# Altium PCB Light Panel.PcbDoc (part 1 of 2)
Units mm, origin at the board's own origin, x right, y up, seen from the top; angles counter-clockwise.
Board outline 300 x 185 mm, 2 copper layers (Top Layer, Bottom Layer), stack 1.671 mm thick; 278 components, 216 nets, 569 pads, 0 vias.
Unrouted connection lines stored in the file: 11.
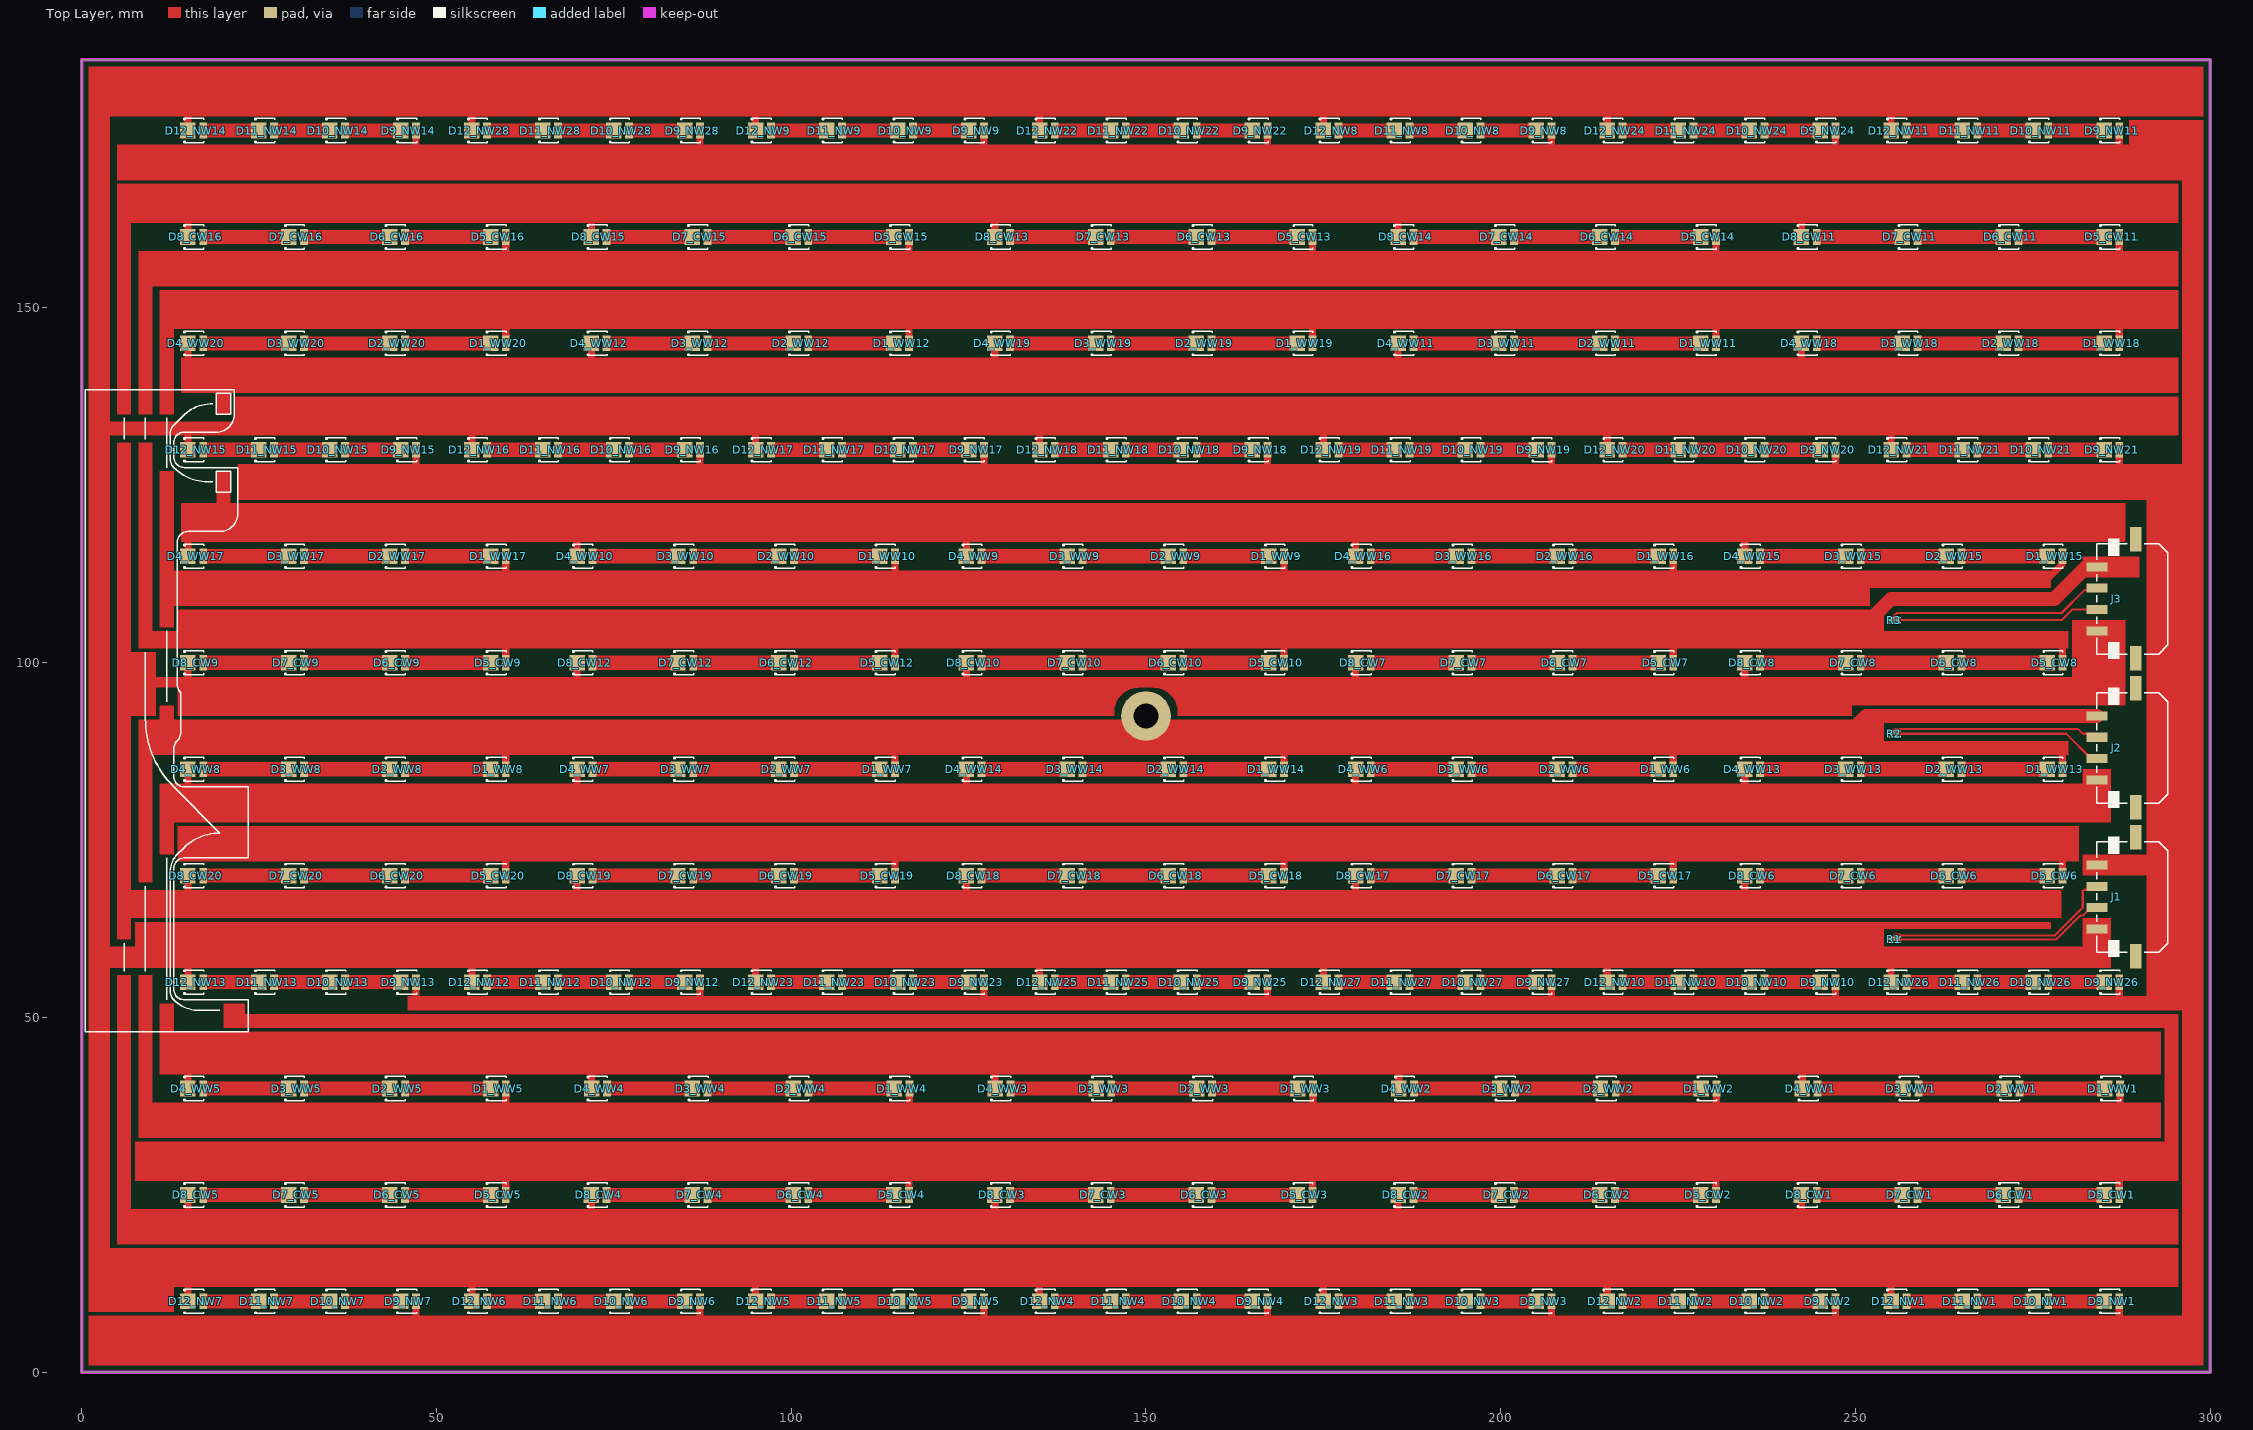
[diagram p0: Top Layer view]
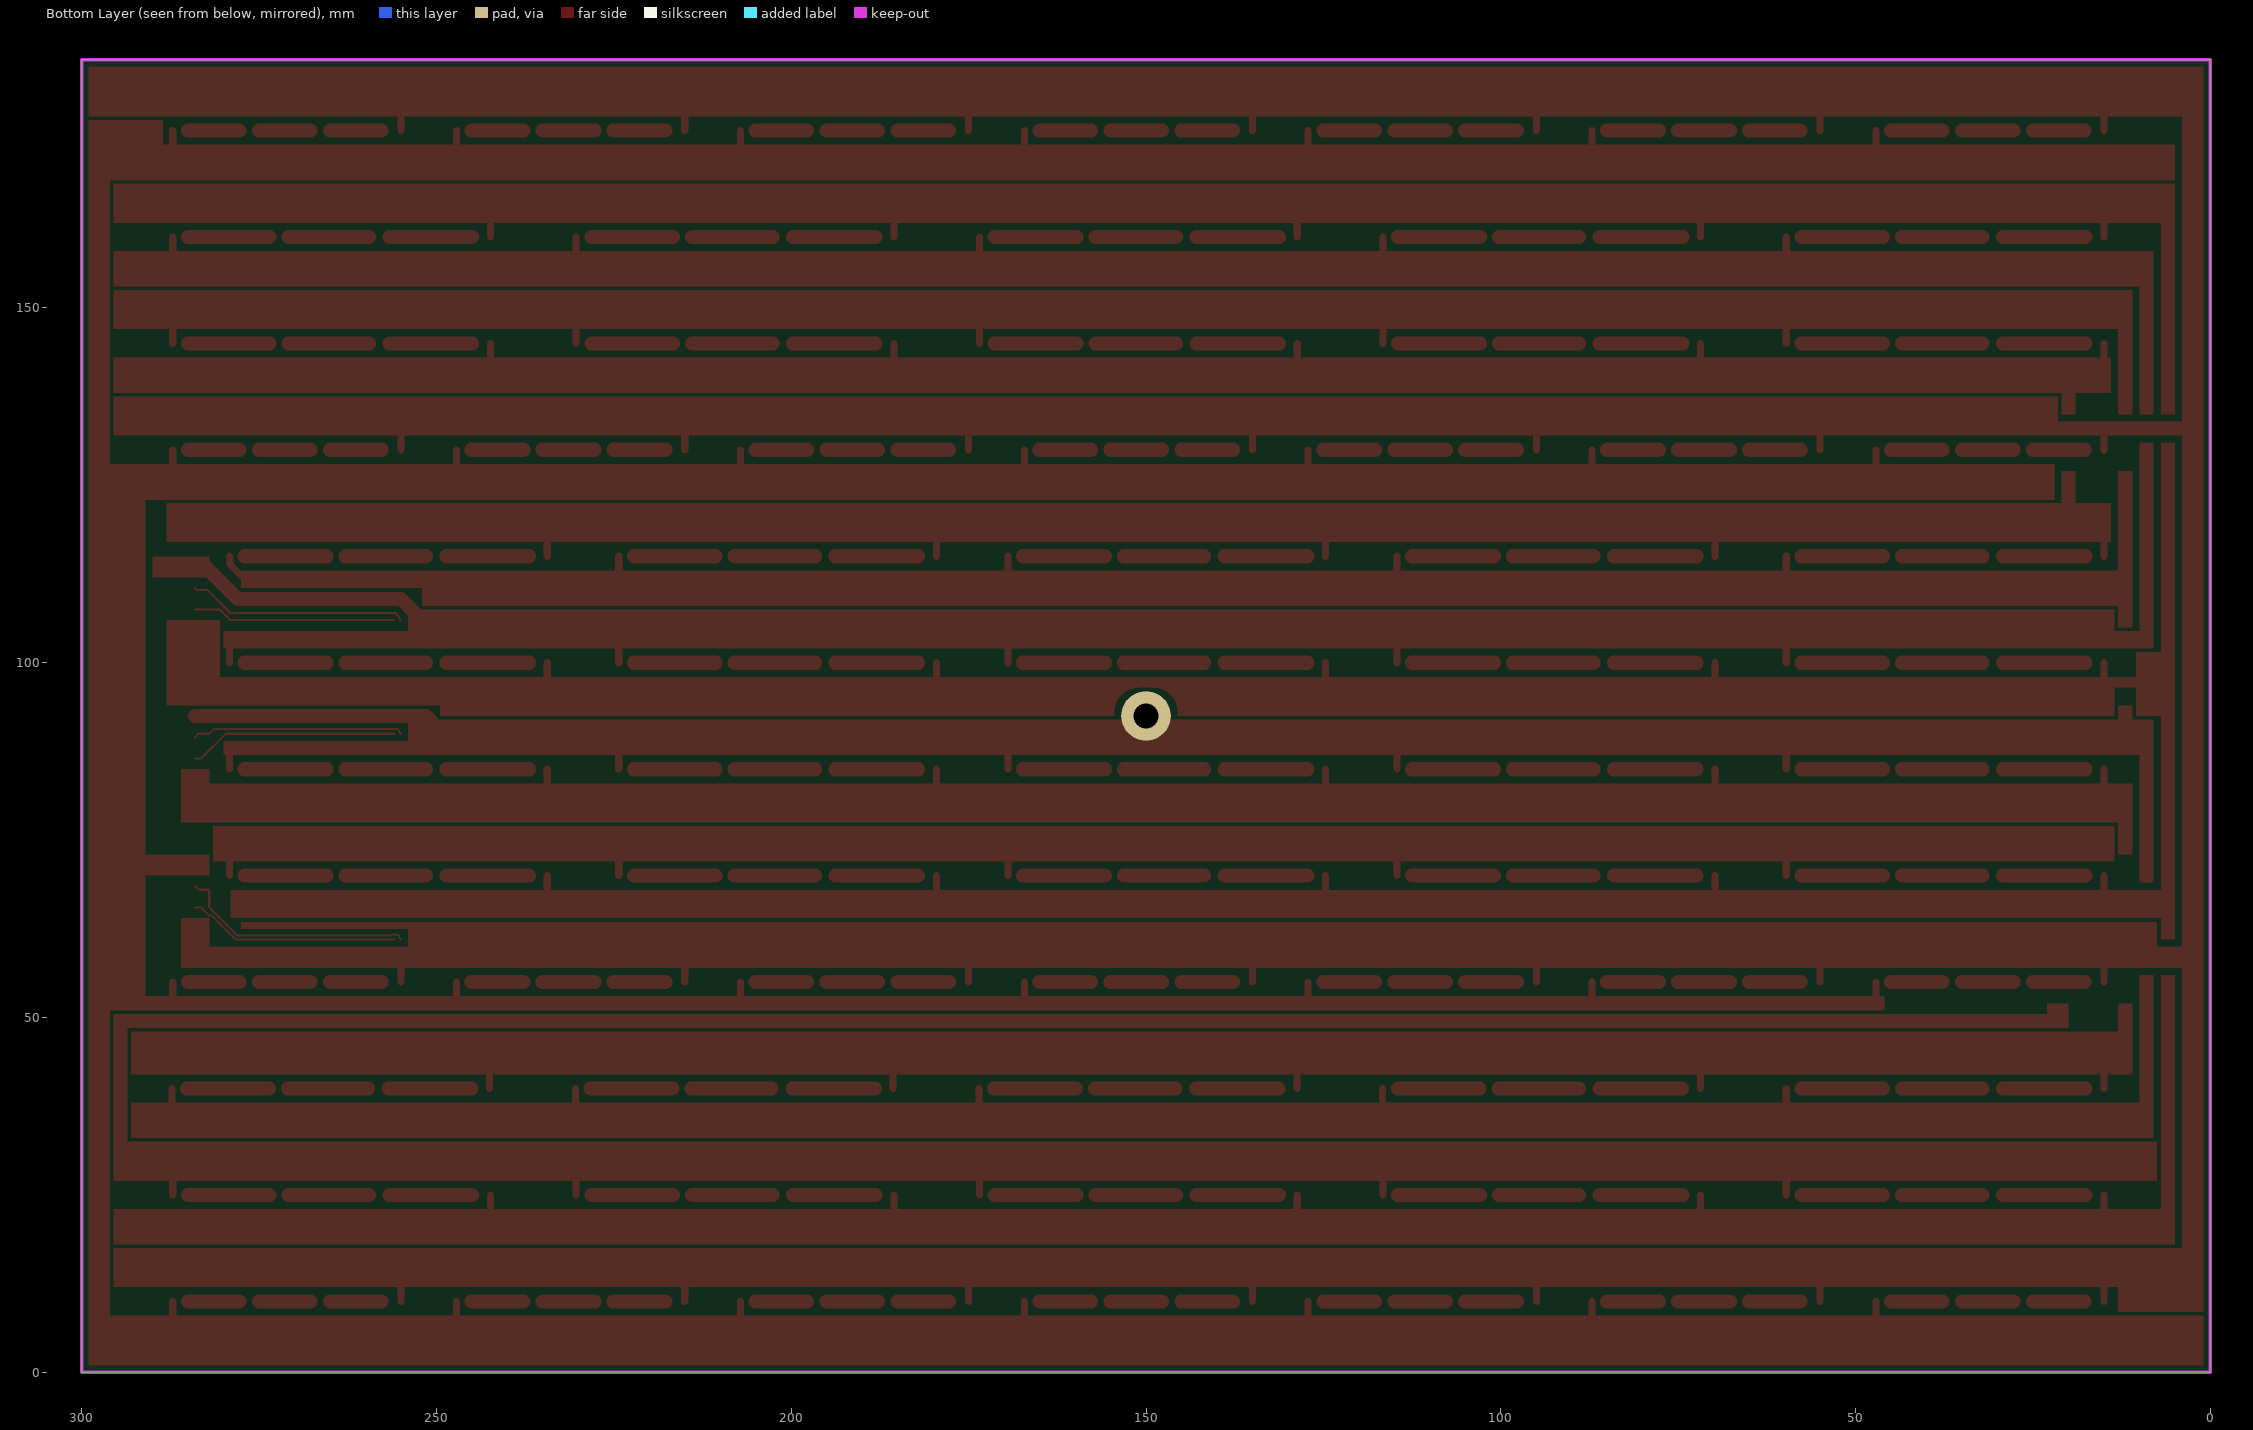
[diagram p1: Bottom Layer view, seen from below]
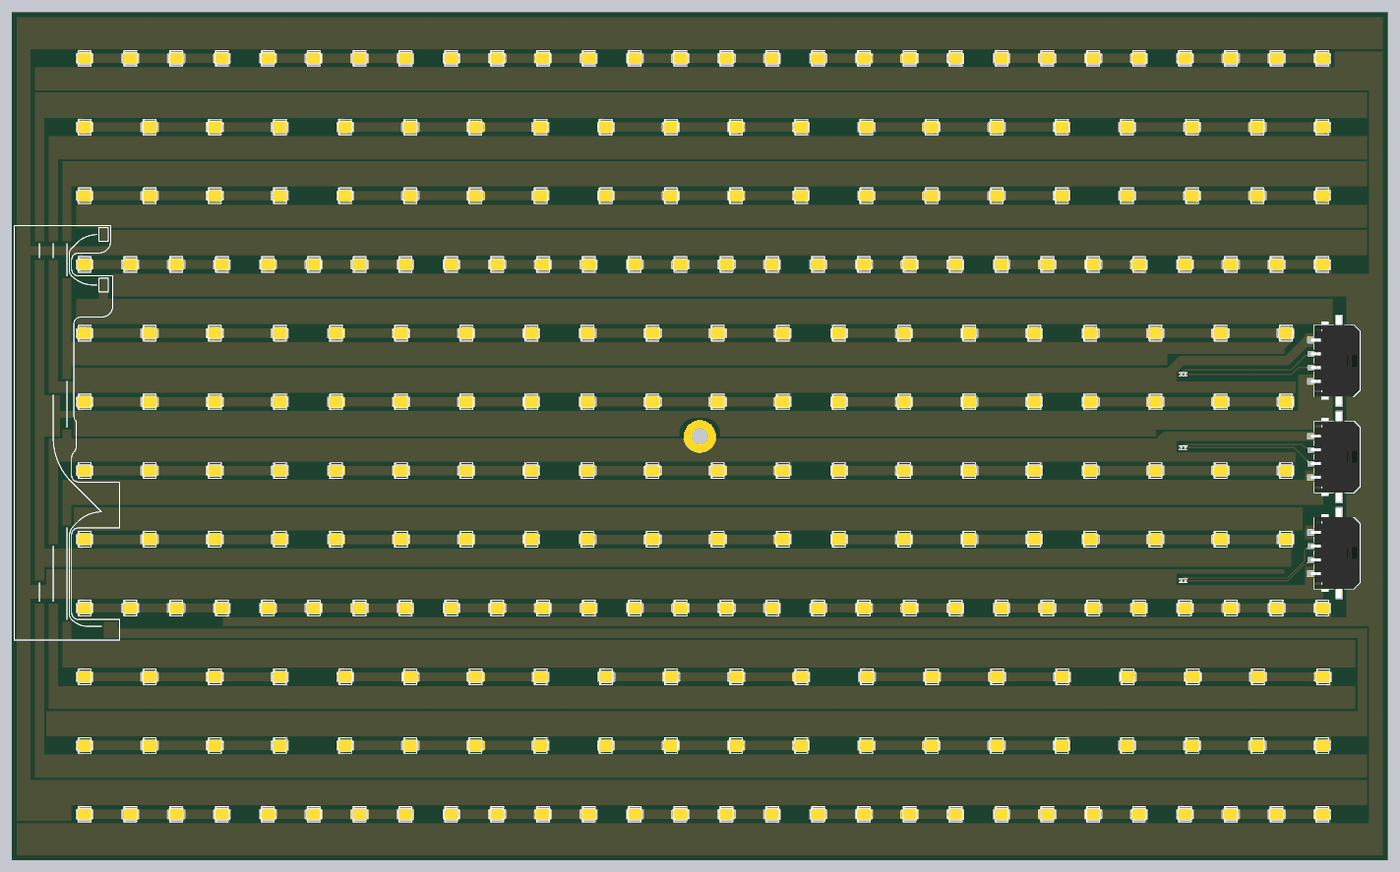
[diagram p3: 3D render of the assembled board from above, using the file's embedded part models]

## Layer stack, top to bottom
Top Solder: solder mask 0.0102, Solder Resist, Dk 3.5
Top Layer: signal copper 0.0356
Dielectric 1: dielectric 0.2, FR-4, Dk 4.8
Aluminium: core 1.4, Al, Dk 4.5
Bottom Layer: signal copper 0.0356
Bottom Solder: solder mask 0.0102, Solder Resist, Dk 3.5

## Board outline
0,0 300,0 300,185 0,185

## Design rules (kind name [scope] priority, off if disabled: settings)
Clearance [All] p1: gap=0.254 ignorepadtopadclearanceinfootprint=FALSE except(0: Arc-Hole Track-Hole SMDPad-Hole THPad-Hole Via-Hole Fill-Hole Poly-Hole Region-Hole Text-Hole)
PolygonConnect [All] p1: connectstyle=Direct reliefconductorwidth=0.254 reliefentries=4 polygonreliefangle="90 Angle" airgapwidth=0.254
RoomDefinition "Studio Light Panel" [InComponentClass('Studio Light Panel')] p1: confinementstyle=ConfineIn formatcopy=TRUE lockcomponents=FALSE outline 300,46.75 300,131.75 250,131.75 250,46.75
RoomDefinition WW15 [InComponentClass('WW15')] p2: confinementstyle=ConfineIn formatcopy=TRUE lockcomponents=FALSE outline 281.818,117.5 231.868,117.5 231.868,112.5 281.818,112.5
RoomDefinition WW13 [InComponentClass('WW13')] p3: confinementstyle=ConfineIn formatcopy=TRUE lockcomponents=FALSE outline 281.818,87.5 231.868,87.5 231.868,82.5 281.818,82.5
RoomDefinition CW8 [InComponentClass('CW8')] p4: confinementstyle=ConfineIn formatcopy=TRUE lockcomponents=FALSE outline 282,102.5 232,102.5 232,97.5 282,97.5
RoomDefinition CW6 [InComponentClass('CW6')] p5: confinementstyle=ConfineIn formatcopy=TRUE lockcomponents=FALSE outline 282,72.5 232,72.5 232,67.5 282,67.5
RoomDefinition WW1 [InComponentClass('WW1')] p6: confinementstyle=ConfineIn formatcopy=TRUE lockcomponents=FALSE outline 289.95,42.5 240,42.5 240,37.5 289.95,37.5
RoomDefinition CW7 [InComponentClass('CW7')] p7: confinementstyle=ConfineIn formatcopy=TRUE lockcomponents=FALSE outline 227.158,102.5 177.158,102.5 177.158,97.5 227.158,97.5
RoomDefinition NW1 [InComponentClass('NW1')] p8: confinementstyle=ConfineIn formatcopy=TRUE lockcomponents=FALSE outline 290,12.5 252,12.5 252,7.5 290,7.5
RoomDefinition NW2 [InComponentClass('NW2')] p9: confinementstyle=ConfineIn formatcopy=TRUE lockcomponents=FALSE outline 250,12.5 212,12.5 212,7.5 250,7.5
RoomDefinition NW3 [InComponentClass('NW3')] p10: confinementstyle=ConfineIn formatcopy=TRUE lockcomponents=FALSE outline 210,12.5 172,12.5 172,7.5 210,7.5
RoomDefinition NW4 [InComponentClass('NW4')] p11: confinementstyle=ConfineIn formatcopy=TRUE lockcomponents=FALSE outline 170,12.5 132,12.5 132,7.5 170,7.5
RoomDefinition NW5 [InComponentClass('NW5')] p12: confinementstyle=ConfineIn formatcopy=TRUE lockcomponents=FALSE outline 130,12.5 92,12.5 92,7.5 130,7.5
RoomDefinition NW6 [InComponentClass('NW6')] p13: confinementstyle=ConfineIn formatcopy=TRUE lockcomponents=FALSE outline 90,12.5 52,12.5 52,7.5 90,7.5
RoomDefinition NW7 [InComponentClass('NW7')] p14: confinementstyle=ConfineIn formatcopy=TRUE lockcomponents=FALSE outline 50,12.5 12,12.5 12,7.5 50,7.5
RoomDefinition NW8 [InComponentClass('NW8')] p15: confinementstyle=ConfineIn formatcopy=TRUE lockcomponents=FALSE outline 210,177.5 172,177.5 172,172.5 210,172.5
RoomDefinition NW9 [InComponentClass('NW9')] p16: confinementstyle=ConfineIn formatcopy=TRUE lockcomponents=FALSE outline 130,177.5 92,177.5 92,172.5 130,172.5
RoomDefinition NW10 [InComponentClass('NW10')] p17: confinementstyle=ConfineIn formatcopy=TRUE lockcomponents=FALSE outline 250,57.5 212,57.5 212,52.5 250,52.5
RoomDefinition NW12 [InComponentClass('NW12')] p18: confinementstyle=ConfineIn formatcopy=TRUE lockcomponents=FALSE outline 90,57.5 52,57.5 52,52.5 90,52.5
RoomDefinition NW13 [InComponentClass('NW13')] p19: confinementstyle=ConfineIn formatcopy=TRUE lockcomponents=FALSE outline 50,57.5 12,57.5 12,52.5 50,52.5
RoomDefinition NW14 [InComponentClass('NW14')] p20: confinementstyle=ConfineIn formatcopy=TRUE lockcomponents=FALSE outline 50,177.5 12,177.5 12,172.5 50,172.5
RoomDefinition NW15 [InComponentClass('NW15')] p21: confinementstyle=ConfineIn formatcopy=TRUE lockcomponents=FALSE outline 50,132.5 12,132.5 12,127.5 50,127.5
RoomDefinition NW16 [InComponentClass('NW16')] p22: confinementstyle=ConfineIn formatcopy=TRUE lockcomponents=FALSE outline 90,132.5 52,132.5 52,127.5 90,127.5
RoomDefinition NW17 [InComponentClass('NW17')] p23: confinementstyle=ConfineIn formatcopy=TRUE lockcomponents=FALSE outline 130,132.5 92,132.5 92,127.5 130,127.5
RoomDefinition NW18 [InComponentClass('NW18')] p24: confinementstyle=ConfineIn formatcopy=TRUE lockcomponents=FALSE outline 170,132.5 132,132.5 132,127.5 170,127.5
RoomDefinition NW19 [InComponentClass('NW19')] p25: confinementstyle=ConfineIn formatcopy=TRUE lockcomponents=FALSE outline 210,132.5 172,132.5 172,127.5 210,127.5
RoomDefinition NW20 [InComponentClass('NW20')] p26: confinementstyle=ConfineIn formatcopy=TRUE lockcomponents=FALSE outline 250,132.5 212,132.5 212,127.5 250,127.5
RoomDefinition NW21 [InComponentClass('NW21')] p27: confinementstyle=ConfineIn formatcopy=TRUE lockcomponents=FALSE outline 290,132.5 252,132.5 252,127.5 290,127.5
RoomDefinition NW22 [InComponentClass('NW22')] p28: confinementstyle=ConfineIn formatcopy=TRUE lockcomponents=FALSE outline 170,177.5 132,177.5 132,172.5 170,172.5
RoomDefinition NW23 [InComponentClass('NW23')] p29: confinementstyle=ConfineIn formatcopy=TRUE lockcomponents=FALSE outline 130,57.5 92,57.5 92,52.5 130,52.5
RoomDefinition NW24 [InComponentClass('NW24')] p30: confinementstyle=ConfineIn formatcopy=TRUE lockcomponents=FALSE outline 250,177.5 212,177.5 212,172.5 250,172.5
RoomDefinition NW25 [InComponentClass('NW25')] p31: confinementstyle=ConfineIn formatcopy=TRUE lockcomponents=FALSE outline 170,57.5 132,57.5 132,52.5 170,52.5
RoomDefinition NW26 [InComponentClass('NW26')] p32: confinementstyle=ConfineIn formatcopy=TRUE lockcomponents=FALSE outline 290,57.5 252,57.5 252,52.5 290,52.5
RoomDefinition NW27 [InComponentClass('NW27')] p33: confinementstyle=ConfineIn formatcopy=TRUE lockcomponents=FALSE outline 210,57.5 172,57.5 172,52.5 210,52.5
RoomDefinition NW28 [InComponentClass('NW28')] p34: confinementstyle=ConfineIn formatcopy=TRUE lockcomponents=FALSE outline 90,177.5 52,177.5 52,172.5 90,172.5
RoomDefinition CW1 [InComponentClass('CW1')] p35: confinementstyle=ConfineIn formatcopy=TRUE lockcomponents=FALSE outline 290,27.5 240,27.5 240,22.5 290,22.5
RoomDefinition CW19 [InComponentClass('CW19')] p36: confinementstyle=ConfineIn formatcopy=TRUE lockcomponents=FALSE outline 117.474,72.5 67.474,72.5 67.474,67.5 117.474,67.5
RoomDefinition CW18 [InComponentClass('CW18')] p37: confinementstyle=ConfineIn formatcopy=TRUE lockcomponents=FALSE outline 172.316,72.5 122.316,72.5 122.316,67.5 172.316,67.5
RoomDefinition CW17 [InComponentClass('CW17')] p38: confinementstyle=ConfineIn formatcopy=TRUE lockcomponents=FALSE outline 227.158,72.5 177.158,72.5 177.158,67.5 227.158,67.5
RoomDefinition CW16 [InComponentClass('CW16')] p39: confinementstyle=ConfineIn formatcopy=TRUE lockcomponents=FALSE outline 62.632,162.5 12.632,162.5 12.632,157.5 62.632,157.5
RoomDefinition CW15 [InComponentClass('CW15')] p40: confinementstyle=ConfineIn formatcopy=TRUE lockcomponents=FALSE outline 119.474,162.5 69.474,162.5 69.474,157.5 119.474,157.5
RoomDefinition CW14 [InComponentClass('CW14')] p41: confinementstyle=ConfineIn formatcopy=TRUE lockcomponents=FALSE outline 233.158,162.5 183.158,162.5 183.158,157.5 233.158,157.5
RoomDefinition CW13 [InComponentClass('CW13')] p42: confinementstyle=ConfineIn formatcopy=TRUE lockcomponents=FALSE outline 176.316,162.5 126.316,162.5 126.316,157.5 176.316,157.5
RoomDefinition CW12 [InComponentClass('CW12')] p43: confinementstyle=ConfineIn formatcopy=TRUE lockcomponents=FALSE outline 117.474,102.5 67.474,102.5 67.474,97.5 117.474,97.5
RoomDefinition CW11 [InComponentClass('CW11')] p44: confinementstyle=ConfineIn formatcopy=TRUE lockcomponents=FALSE outline 290,162.5 240,162.5 240,157.5 290,157.5
RoomDefinition CW2 [InComponentClass('CW2')] p45: confinementstyle=ConfineIn formatcopy=TRUE lockcomponents=FALSE outline 233.158,27.5 183.158,27.5 183.158,22.5 233.158,22.5
RoomDefinition CW3 [InComponentClass('CW3')] p46: confinementstyle=ConfineIn formatcopy=TRUE lockcomponents=FALSE outline 176.316,27.5 126.316,27.5 126.316,22.5 176.316,22.5
RoomDefinition CW4 [InComponentClass('CW4')] p47: confinementstyle=ConfineIn formatcopy=TRUE lockcomponents=FALSE outline 119.474,27.5 69.474,27.5 69.474,22.5 119.474,22.5
RoomDefinition CW5 [InComponentClass('CW5')] p48: confinementstyle=ConfineIn formatcopy=TRUE lockcomponents=FALSE outline 62.632,27.5 12.632,27.5 12.632,22.5 62.632,22.5
RoomDefinition CW9 [InComponentClass('CW9')] p49: confinementstyle=ConfineIn formatcopy=TRUE lockcomponents=FALSE outline 62.632,102.5 12.632,102.5 12.632,97.5 62.632,97.5
RoomDefinition CW20 [InComponentClass('CW20')] p50: confinementstyle=ConfineIn formatcopy=TRUE lockcomponents=FALSE outline 62.632,72.5 12.632,72.5 12.632,67.5 62.632,67.5
RoomDefinition CW10 [InComponentClass('CW10')] p51: confinementstyle=ConfineIn formatcopy=TRUE lockcomponents=FALSE outline 172.316,102.5 122.316,102.5 122.316,97.5 172.316,97.5
RoomDefinition WW20 [InComponentClass('WW20')] p52: confinementstyle=ConfineIn formatcopy=TRUE lockcomponents=FALSE outline 62.45,147.5 12.5,147.5 12.5,142.5 62.45,142.5
RoomDefinition WW19 [InComponentClass('WW19')] p53: confinementstyle=ConfineIn formatcopy=TRUE lockcomponents=FALSE outline 176.134,147.5 126.184,147.5 126.184,142.5 176.134,142.5
RoomDefinition WW18 [InComponentClass('WW18')] p54: confinementstyle=ConfineIn formatcopy=TRUE lockcomponents=FALSE outline 289.818,147.5 239.868,147.5 239.868,142.5 289.818,142.5
RoomDefinition WW17 [InComponentClass('WW17')] p55: confinementstyle=ConfineIn formatcopy=TRUE lockcomponents=FALSE outline 62.45,117.5 12.5,117.5 12.5,112.5 62.45,112.5
RoomDefinition WW16 [InComponentClass('WW16')] p56: confinementstyle=ConfineIn formatcopy=TRUE lockcomponents=FALSE outline 226.976,117.5 177.026,117.5 177.026,112.5 226.976,112.5
RoomDefinition WW14 [InComponentClass('WW14')] p57: confinementstyle=ConfineIn formatcopy=TRUE lockcomponents=FALSE outline 172.134,87.5 122.184,87.5 122.184,82.5 172.134,82.5
RoomDefinition WW12 [InComponentClass('WW12')] p58: confinementstyle=ConfineIn formatcopy=TRUE lockcomponents=FALSE outline 119.292,147.5 69.342,147.5 69.342,142.5 119.292,142.5
RoomDefinition WW11 [InComponentClass('WW11')] p59: confinementstyle=ConfineIn formatcopy=TRUE lockcomponents=FALSE outline 232.976,147.5 183.026,147.5 183.026,142.5 232.976,142.5
RoomDefinition WW10 [InComponentClass('WW10')] p60: confinementstyle=ConfineIn formatcopy=TRUE lockcomponents=FALSE outline 117.292,117.5 67.342,117.5 67.342,112.5 117.292,112.5
RoomDefinition WW9 [InComponentClass('WW9')] p61: confinementstyle=ConfineIn formatcopy=TRUE lockcomponents=FALSE outline 172.134,117.5 122.184,117.5 122.184,112.5 172.134,112.5
RoomDefinition WW8 [InComponentClass('WW8')] p62: confinementstyle=ConfineIn formatcopy=TRUE lockcomponents=FALSE outline 62.45,87.5 12.5,87.5 12.5,82.5 62.45,82.5
RoomDefinition WW7 [InComponentClass('WW7')] p63: confinementstyle=ConfineIn formatcopy=TRUE lockcomponents=FALSE outline 117.292,87.5 67.342,87.5 67.342,82.5 117.292,82.5
RoomDefinition WW6 [InComponentClass('WW6')] p64: confinementstyle=ConfineIn formatcopy=TRUE lockcomponents=FALSE outline 226.976,87.5 177.026,87.5 177.026,82.5 226.976,82.5
RoomDefinition WW5 [InComponentClass('WW5')] p65: confinementstyle=ConfineIn formatcopy=TRUE lockcomponents=FALSE outline 62.45,42.5 12.5,42.5 12.5,37.5 62.45,37.5
RoomDefinition WW4 [InComponentClass('WW4')] p66: confinementstyle=ConfineIn formatcopy=TRUE lockcomponents=FALSE outline 119.325,42.5 69.375,42.5 69.375,37.5 119.325,37.5
RoomDefinition WW3 [InComponentClass('WW3')] p67: confinementstyle=ConfineIn formatcopy=TRUE lockcomponents=FALSE outline 176.2,42.5 126.25,42.5 126.25,37.5 176.2,37.5
RoomDefinition WW2 [InComponentClass('WW2')] p68: confinementstyle=ConfineIn formatcopy=TRUE lockcomponents=FALSE outline 233.075,42.5 183.125,42.5 183.125,37.5 233.075,37.5
RoomDefinition NW11 [InComponentClass('NW11')] p69: confinementstyle=ConfineIn formatcopy=TRUE lockcomponents=FALSE outline 290,177.5 252,177.5 252,172.5 290,172.5
RoutingVias [All] p1: holewidth=0.711 width=1.27 viastyle="Through Hole" minholewidth=0.711 minwidth=1.27 maxholewidth=0.711 maxwidth=1.27
SolderMaskExpansion [All] p1: expansion=0.102 istentingtop=FALSE
Width [All] p1: maxlimit=6 minlimit=0.3 preferedwidth=2.5
30 further rules are at their usual default settings.

## Classes and differential pairs
channel class "Warm White LEDs": WW1 WW2 WW3 WW4 WW5 WW6 WW7 WW8 WW9 WW10 WW11 WW12 WW13 WW14 WW15 WW16 WW17 WW18 WW19 WW20
channel class "Neutral White LEDs": NW1 NW2 NW3 NW4 NW5 NW6 NW7 NW8 NW9 NW10 NW11 NW12 NW13 NW14 NW15 NW16 NW17 NW18 NW19 NW20 NW21 NW22 NW23 NW24 NW25 NW26 NW27 NW28
channel class "Cool White LEDs": CW1 CW2 CW3 CW4 CW5 CW6 CW7 CW8 CW9 CW10 CW11 CW12 CW13 CW14 CW15 CW16 CW17 CW18 CW19 CW20
component class WW20: D1_WW20 D2_WW20 D3_WW20 D4_WW20
component class WW19: D1_WW19 D2_WW19 D3_WW19 D4_WW19
component class WW18: D1_WW18 D2_WW18 D3_WW18 D4_WW18
component class WW17: D1_WW17 D2_WW17 D3_WW17 D4_WW17
component class WW16: D1_WW16 D2_WW16 D3_WW16 D4_WW16
component class WW15: D1_WW15 D2_WW15 D3_WW15 D4_WW15
component class WW14: D1_WW14 D2_WW14 D3_WW14 D4_WW14
component class WW13: D1_WW13 D2_WW13 D3_WW13 D4_WW13
component class WW12: D1_WW12 D2_WW12 D3_WW12 D4_WW12
component class WW11: D1_WW11 D2_WW11 D3_WW11 D4_WW11
component class WW10: D1_WW10 D2_WW10 D3_WW10 D4_WW10
component class WW9: D1_WW9 D2_WW9 D3_WW9 D4_WW9
component class WW8: D1_WW8 D2_WW8 D3_WW8 D4_WW8
component class WW7: D1_WW7 D2_WW7 D3_WW7 D4_WW7
component class WW6: D1_WW6 D2_WW6 D3_WW6 D4_WW6
component class WW5: D1_WW5 D2_WW5 D3_WW5 D4_WW5
component class WW4: D1_WW4 D2_WW4 D3_WW4 D4_WW4
component class WW3: D1_WW3 D2_WW3 D3_WW3 D4_WW3
component class WW2: D1_WW2 D2_WW2 D3_WW2 D4_WW2
component class WW1: D1_WW1 D2_WW1 D3_WW1 D4_WW1
component class "Studio Light Panel": J1 J2 J3 R1 R2 R3
component class NW28: D9_NW28 D10_NW28 D11_NW28 D12_NW28
component class NW27: D9_NW27 D10_NW27 D11_NW27 D12_NW27
component class NW26: D9_NW26 D10_NW26 D11_NW26 D12_NW26
component class NW25: D9_NW25 D10_NW25 D11_NW25 D12_NW25
component class NW24: D9_NW24 D10_NW24 D11_NW24 D12_NW24
component class NW23: D9_NW23 D10_NW23 D11_NW23 D12_NW23
component class NW22: D9_NW22 D10_NW22 D11_NW22 D12_NW22
component class NW21: D9_NW21 D10_NW21 D11_NW21 D12_NW21
component class NW20: D9_NW20 D10_NW20 D11_NW20 D12_NW20
component class NW19: D9_NW19 D10_NW19 D11_NW19 D12_NW19
component class NW18: D9_NW18 D10_NW18 D11_NW18 D12_NW18
component class NW17: D9_NW17 D10_NW17 D11_NW17 D12_NW17
component class NW16: D9_NW16 D10_NW16 D11_NW16 D12_NW16
component class NW15: D9_NW15 D10_NW15 D11_NW15 D12_NW15
component class NW14: D9_NW14 D10_NW14 D11_NW14 D12_NW14
component class NW13: D9_NW13 D10_NW13 D11_NW13 D12_NW13
component class NW12: D9_NW12 D10_NW12 D11_NW12 D12_NW12
component class NW11: D9_NW11 D10_NW11 D11_NW11 D12_NW11
component class NW10: D9_NW10 D10_NW10 D11_NW10 D12_NW10
component class NW9: D9_NW9 D10_NW9 D11_NW9 D12_NW9
component class NW8: D9_NW8 D10_NW8 D11_NW8 D12_NW8
component class NW7: D9_NW7 D10_NW7 D11_NW7 D12_NW7
component class NW6: D9_NW6 D10_NW6 D11_NW6 D12_NW6
component class NW5: D9_NW5 D10_NW5 D11_NW5 D12_NW5
component class NW4: D9_NW4 D10_NW4 D11_NW4 D12_NW4
component class NW3: D9_NW3 D10_NW3 D11_NW3 D12_NW3
component class NW2: D9_NW2 D10_NW2 D11_NW2 D12_NW2
component class NW1: D9_NW1 D10_NW1 D11_NW1 D12_NW1
component class CW20: D5_CW20 D6_CW20 D7_CW20 D8_CW20
component class CW19: D5_CW19 D6_CW19 D7_CW19 D8_CW19
component class CW18: D5_CW18 D6_CW18 D7_CW18 D8_CW18
component class CW17: D5_CW17 D6_CW17 D7_CW17 D8_CW17
component class CW16: D5_CW16 D6_CW16 D7_CW16 D8_CW16
component class CW15: D5_CW15 D6_CW15 D7_CW15 D8_CW15
component class CW14: D5_CW14 D6_CW14 D7_CW14 D8_CW14
component class CW13: D5_CW13 D6_CW13 D7_CW13 D8_CW13
component class CW12: D5_CW12 D6_CW12 D7_CW12 D8_CW12
component class CW11: D5_CW11 D6_CW11 D7_CW11 D8_CW11
component class CW10: D5_CW10 D6_CW10 D7_CW10 D8_CW10
component class CW9: D5_CW9 D6_CW9 D7_CW9 D8_CW9
component class CW8: D5_CW8 D6_CW8 D7_CW8 D8_CW8
component class CW7: D5_CW7 D6_CW7 D7_CW7 D8_CW7
component class CW6: D5_CW6 D6_CW6 D7_CW6 D8_CW6
component class CW5: D5_CW5 D6_CW5 D7_CW5 D8_CW5
component class CW4: D5_CW4 D6_CW4 D7_CW4 D8_CW4
component class CW3: D5_CW3 D6_CW3 D7_CW3 D8_CW3
component class CW2: D5_CW2 D6_CW2 D7_CW2 D8_CW2
component class CW1: D5_CW1 D6_CW1 D7_CW1 D8_CW1

## Components (designator, comment, footprint, x,y, rotation, side; value= is the part's Value field where it differs from the comment)
D1_WW1 "SPMWH1228MD7WAVUVK" "SAMSUNG LM281BPLUS" 285.937,40 r180 top (schematic designator D1)
D1_WW2 "SPMWH1228MD7WAVUVK" "SAMSUNG LM281BPLUS" 229.062,40 r180 top (schematic designator D1)
D1_WW3 "SPMWH1228MD7WAVUVK" "SAMSUNG LM281BPLUS" 172.187,40 r180 top (schematic designator D1)
D1_WW4 "SPMWH1228MD7WAVUVK" "SAMSUNG LM281BPLUS" 115.312,40 r180 top (schematic designator D1)
D1_WW5 "SPMWH1228MD7WAVUVK" "SAMSUNG LM281BPLUS" 58.437,40 r180 top (schematic designator D1)
D1_WW6 "SPMWH1228MD7WAVUVK" "SAMSUNG LM281BPLUS" 222.963,85 r180 top (schematic designator D1)
D1_WW7 "SPMWH1228MD7WAVUVK" "SAMSUNG LM281BPLUS" 113.279,85 r180 top (schematic designator D1)
D1_WW8 "SPMWH1228MD7WAVUVK" "SAMSUNG LM281BPLUS" 58.437,85 r180 top (schematic designator D1)
D1_WW9 "SPMWH1228MD7WAVUVK" "SAMSUNG LM281BPLUS" 168.121,115 r180 top (schematic designator D1)
D1_WW10 "SPMWH1228MD7WAVUVK" "SAMSUNG LM281BPLUS" 113.279,115 r180 top (schematic designator D1)
D1_WW11 "SPMWH1228MD7WAVUVK" "SAMSUNG LM281BPLUS" 228.963,145 r180 top (schematic designator D1)
D1_WW12 "SPMWH1228MD7WAVUVK" "SAMSUNG LM281BPLUS" 115.279,145 r180 top (schematic designator D1)
D1_WW13 "SPMWH1228MD7WAVUVK" "SAMSUNG LM281BPLUS" 277.805,85 r180 top (schematic designator D1)
D1_WW14 "SPMWH1228MD7WAVUVK" "SAMSUNG LM281BPLUS" 168.121,85 r180 top (schematic designator D1)
D1_WW15 "SPMWH1228MD7WAVUVK" "SAMSUNG LM281BPLUS" 277.805,115 r180 top (schematic designator D1)
D1_WW16 "SPMWH1228MD7WAVUVK" "SAMSUNG LM281BPLUS" 222.963,115 r180 top (schematic designator D1)
D1_WW17 "SPMWH1228MD7WAVUVK" "SAMSUNG LM281BPLUS" 58.437,115 r180 top (schematic designator D1)
D1_WW18 "SPMWH1228MD7WAVUVK" "SAMSUNG LM281BPLUS" 285.805,145 r180 top (schematic designator D1)
D1_WW19 "SPMWH1228MD7WAVUVK" "SAMSUNG LM281BPLUS" 172.121,145 r180 top (schematic designator D1)
D1_WW20 "SPMWH1228MD7WAVUVK" "SAMSUNG LM281BPLUS" 58.437,145 r180 top (schematic designator D1)
D2_WW1 "SPMWH1228MD7WAVUVK" "SAMSUNG LM281BPLUS" 271.726,40 r180 top (schematic designator D2)
D2_WW2 "SPMWH1228MD7WAVUVK" "SAMSUNG LM281BPLUS" 214.851,40 r180 top (schematic designator D2)
D2_WW3 "SPMWH1228MD7WAVUVK" "SAMSUNG LM281BPLUS" 157.976,40 r180 top (schematic designator D2)
D2_WW4 "SPMWH1228MD7WAVUVK" "SAMSUNG LM281BPLUS" 101.101,40 r180 top (schematic designator D2)
D2_WW5 "SPMWH1228MD7WAVUVK" "SAMSUNG LM281BPLUS" 44.226,40 r180 top (schematic designator D2)
D2_WW6 "SPMWH1228MD7WAVUVK" "SAMSUNG LM281BPLUS" 208.752,85 r180 top (schematic designator D2)
D2_WW7 "SPMWH1228MD7WAVUVK" "SAMSUNG LM281BPLUS" 99.068,85 r180 top (schematic designator D2)
D2_WW8 "SPMWH1228MD7WAVUVK" "SAMSUNG LM281BPLUS" 44.226,85 r180 top (schematic designator D2)
D2_WW9 "SPMWH1228MD7WAVUVK" "SAMSUNG LM281BPLUS" 153.91,115 r180 top (schematic designator D2)
D2_WW10 "SPMWH1228MD7WAVUVK" "SAMSUNG LM281BPLUS" 99.068,115 r180 top (schematic designator D2)
D2_WW11 "SPMWH1228MD7WAVUVK" "SAMSUNG LM281BPLUS" 214.752,145 r180 top (schematic designator D2)
D2_WW12 "SPMWH1228MD7WAVUVK" "SAMSUNG LM281BPLUS" 101.068,145 r180 top (schematic designator D2)
D2_WW13 "SPMWH1228MD7WAVUVK" "SAMSUNG LM281BPLUS" 263.594,85 r180 top (schematic designator D2)
D2_WW14 "SPMWH1228MD7WAVUVK" "SAMSUNG LM281BPLUS" 153.91,85 r180 top (schematic designator D2)
D2_WW15 "SPMWH1228MD7WAVUVK" "SAMSUNG LM281BPLUS" 263.594,115 r180 top (schematic designator D2)
D2_WW16 "SPMWH1228MD7WAVUVK" "SAMSUNG LM281BPLUS" 208.752,115 r180 top (schematic designator D2)
D2_WW17 "SPMWH1228MD7WAVUVK" "SAMSUNG LM281BPLUS" 44.226,115 r180 top (schematic designator D2)
D2_WW18 "SPMWH1228MD7WAVUVK" "SAMSUNG LM281BPLUS" 271.594,145 r180 top (schematic designator D2)
D2_WW19 "SPMWH1228MD7WAVUVK" "SAMSUNG LM281BPLUS" 157.91,145 r180 top (schematic designator D2)
D2_WW20 "SPMWH1228MD7WAVUVK" "SAMSUNG LM281BPLUS" 44.226,145 r180 top (schematic designator D2)
D3_WW1 "SPMWH1228MD7WAVUVK" "SAMSUNG LM281BPLUS" 257.516,40 r180 top (schematic designator D3)
D3_WW2 "SPMWH1228MD7WAVUVK" "SAMSUNG LM281BPLUS" 200.641,40 r180 top (schematic designator D3)
D3_WW3 "SPMWH1228MD7WAVUVK" "SAMSUNG LM281BPLUS" 143.766,40 r180 top (schematic designator D3)
D3_WW4 "SPMWH1228MD7WAVUVK" "SAMSUNG LM281BPLUS" 86.891,40 r180 top (schematic designator D3)
D3_WW5 "SPMWH1228MD7WAVUVK" "SAMSUNG LM281BPLUS" 30.016,40 r180 top (schematic designator D3)
D3_WW6 "SPMWH1228MD7WAVUVK" "SAMSUNG LM281BPLUS" 194.542,85 r180 top (schematic designator D3)
D3_WW7 "SPMWH1228MD7WAVUVK" "SAMSUNG LM281BPLUS" 84.858,85 r180 top (schematic designator D3)
D3_WW8 "SPMWH1228MD7WAVUVK" "SAMSUNG LM281BPLUS" 30.016,85 r180 top (schematic designator D3)
D3_WW9 "SPMWH1228MD7WAVUVK" "SAMSUNG LM281BPLUS" 139.7,115 r180 top (schematic designator D3)
D3_WW10 "SPMWH1228MD7WAVUVK" "SAMSUNG LM281BPLUS" 84.858,115 r180 top (schematic designator D3)
D3_WW11 "SPMWH1228MD7WAVUVK" "SAMSUNG LM281BPLUS" 200.542,145 r180 top (schematic designator D3)
D3_WW12 "SPMWH1228MD7WAVUVK" "SAMSUNG LM281BPLUS" 86.858,145 r180 top (schematic designator D3)
D3_WW13 "SPMWH1228MD7WAVUVK" "SAMSUNG LM281BPLUS" 249.384,85 r180 top (schematic designator D3)
D3_WW14 "SPMWH1228MD7WAVUVK" "SAMSUNG LM281BPLUS" 139.7,85 r180 top (schematic designator D3)
D3_WW15 "SPMWH1228MD7WAVUVK" "SAMSUNG LM281BPLUS" 249.384,115 r180 top (schematic designator D3)
D3_WW16 "SPMWH1228MD7WAVUVK" "SAMSUNG LM281BPLUS" 194.542,115 r180 top (schematic designator D3)
D3_WW17 "SPMWH1228MD7WAVUVK" "SAMSUNG LM281BPLUS" 30.016,115 r180 top (schematic designator D3)
D3_WW18 "SPMWH1228MD7WAVUVK" "SAMSUNG LM281BPLUS" 257.384,145 r180 top (schematic designator D3)
D3_WW19 "SPMWH1228MD7WAVUVK" "SAMSUNG LM281BPLUS" 143.7,145 r180 top (schematic designator D3)
D3_WW20 "SPMWH1228MD7WAVUVK" "SAMSUNG LM281BPLUS" 30.016,145 r180 top (schematic designator D3)
D4_WW1 "SPMWH1228MD7WAVUVK" "SAMSUNG LM281BPLUS" 243.305,40 r180 top (schematic designator D4)
D4_WW2 "SPMWH1228MD7WAVUVK" "SAMSUNG LM281BPLUS" 186.43,40 r180 top (schematic designator D4)
D4_WW3 "SPMWH1228MD7WAVUVK" "SAMSUNG LM281BPLUS" 129.555,40 r180 top (schematic designator D4)
D4_WW4 "SPMWH1228MD7WAVUVK" "SAMSUNG LM281BPLUS" 72.68,40 r180 top (schematic designator D4)
D4_WW5 "SPMWH1228MD7WAVUVK" "SAMSUNG LM281BPLUS" 15.805,40 r180 top (schematic designator D4)
D4_WW6 "SPMWH1228MD7WAVUVK" "SAMSUNG LM281BPLUS" 180.331,85 r180 top (schematic designator D4)
D4_WW7 "SPMWH1228MD7WAVUVK" "SAMSUNG LM281BPLUS" 70.647,85 r180 top (schematic designator D4)
D4_WW8 "SPMWH1228MD7WAVUVK" "SAMSUNG LM281BPLUS" 15.805,85 r180 top (schematic designator D4)
D4_WW9 "SPMWH1228MD7WAVUVK" "SAMSUNG LM281BPLUS" 125.489,115 r180 top (schematic designator D4)
D4_WW10 "SPMWH1228MD7WAVUVK" "SAMSUNG LM281BPLUS" 70.647,115 r180 top (schematic designator D4)
D4_WW11 "SPMWH1228MD7WAVUVK" "SAMSUNG LM281BPLUS" 186.331,145 r180 top (schematic designator D4)
D4_WW12 "SPMWH1228MD7WAVUVK" "SAMSUNG LM281BPLUS" 72.647,145 r180 top (schematic designator D4)
D4_WW13 "SPMWH1228MD7WAVUVK" "SAMSUNG LM281BPLUS" 235.173,85 r180 top (schematic designator D4)
D4_WW14 "SPMWH1228MD7WAVUVK" "SAMSUNG LM281BPLUS" 125.489,85 r180 top (schematic designator D4)
D4_WW15 "SPMWH1228MD7WAVUVK" "SAMSUNG LM281BPLUS" 235.173,115 r180 top (schematic designator D4)
D4_WW16 "SPMWH1228MD7WAVUVK" "SAMSUNG LM281BPLUS" 180.331,115 r180 top (schematic designator D4)
D4_WW17 "SPMWH1228MD7WAVUVK" "SAMSUNG LM281BPLUS" 15.805,115 r180 top (schematic designator D4)
D4_WW18 "SPMWH1228MD7WAVUVK" "SAMSUNG LM281BPLUS" 243.173,145 r180 top (schematic designator D4)
D4_WW19 "SPMWH1228MD7WAVUVK" "SAMSUNG LM281BPLUS" 129.489,145 r180 top (schematic designator D4)
D4_WW20 "SPMWH1228MD7WAVUVK" "SAMSUNG LM281BPLUS" 15.805,145 r180 top (schematic designator D4)
D5_CW1 "SPMWH1228MD7WAPMVL" "SAMSUNG LM281BPLUS" 285.805,25 r180 top (schematic designator D5)
D5_CW2 "SPMWH1228MD7WAPMVL" "SAMSUNG LM281BPLUS" 228.963,25 r180 top (schematic designator D5)
D5_CW3 "SPMWH1228MD7WAPMVL" "SAMSUNG LM281BPLUS" 172.121,25 r180 top (schematic designator D5)
D5_CW4 "SPMWH1228MD7WAPMVL" "SAMSUNG LM281BPLUS" 115.279,25 r180 top (schematic designator D5)
D5_CW5 "SPMWH1228MD7WAPMVL" "SAMSUNG LM281BPLUS" 58.437,25 r180 top (schematic designator D5)
D5_CW6 "SPMWH1228MD7WAPMVL" "SAMSUNG LM281BPLUS" 277.805,70 r180 top (schematic designator D5)
D5_CW7 "SPMWH1228MD7WAPMVL" "SAMSUNG LM281BPLUS" 222.963,100 r180 top (schematic designator D5)
D5_CW8 "SPMWH1228MD7WAPMVL" "SAMSUNG LM281BPLUS" 277.805,100 r180 top (schematic designator D5)
D5_CW9 "SPMWH1228MD7WAPMVL" "SAMSUNG LM281BPLUS" 58.437,100 r180 top (schematic designator D5)
D5_CW10 "SPMWH1228MD7WAPMVL" "SAMSUNG LM281BPLUS" 168.121,100 r180 top (schematic designator D5)
D5_CW11 "SPMWH1228MD7WAPMVL" "SAMSUNG LM281BPLUS" 285.805,160 r180 top (schematic designator D5)
D5_CW12 "SPMWH1228MD7WAPMVL" "SAMSUNG LM281BPLUS" 113.279,100 r180 top (schematic designator D5)
D5_CW13 "SPMWH1228MD7WAPMVL" "SAMSUNG LM281BPLUS" 172.121,160 r180 top (schematic designator D5)
D5_CW14 "SPMWH1228MD7WAPMVL" "SAMSUNG LM281BPLUS" 228.963,160 r180 top (schematic designator D5)
D5_CW15 "SPMWH1228MD7WAPMVL" "SAMSUNG LM281BPLUS" 115.279,160 r180 top (schematic designator D5)
D5_CW16 "SPMWH1228MD7WAPMVL" "SAMSUNG LM281BPLUS" 58.437,160 r180 top (schematic designator D5)
D5_CW17 "SPMWH1228MD7WAPMVL" "SAMSUNG LM281BPLUS" 222.963,70 r180 top (schematic designator D5)
D5_CW18 "SPMWH1228MD7WAPMVL" "SAMSUNG LM281BPLUS" 168.121,70 r180 top (schematic designator D5)
D5_CW19 "SPMWH1228MD7WAPMVL" "SAMSUNG LM281BPLUS" 113.279,70 r180 top (schematic designator D5)
D5_CW20 "SPMWH1228MD7WAPMVL" "SAMSUNG LM281BPLUS" 58.437,70 r180 top (schematic designator D5)
D6_CW1 "SPMWH1228MD7WAPMVL" "SAMSUNG LM281BPLUS" 271.594,25 r180 top (schematic designator D6)
D6_CW2 "SPMWH1228MD7WAPMVL" "SAMSUNG LM281BPLUS" 214.752,25 r180 top (schematic designator D6)
D6_CW3 "SPMWH1228MD7WAPMVL" "SAMSUNG LM281BPLUS" 157.91,25 r180 top (schematic designator D6)
D6_CW4 "SPMWH1228MD7WAPMVL" "SAMSUNG LM281BPLUS" 101.068,25 r180 top (schematic designator D6)
D6_CW5 "SPMWH1228MD7WAPMVL" "SAMSUNG LM281BPLUS" 44.226,25 r180 top (schematic designator D6)
D6_CW6 "SPMWH1228MD7WAPMVL" "SAMSUNG LM281BPLUS" 263.594,70 r180 top (schematic designator D6)
D6_CW7 "SPMWH1228MD7WAPMVL" "SAMSUNG LM281BPLUS" 208.752,100 r180 top (schematic designator D6)
D6_CW8 "SPMWH1228MD7WAPMVL" "SAMSUNG LM281BPLUS" 263.594,100 r180 top (schematic designator D6)
D6_CW9 "SPMWH1228MD7WAPMVL" "SAMSUNG LM281BPLUS" 44.226,100 r180 top (schematic designator D6)
D6_CW10 "SPMWH1228MD7WAPMVL" "SAMSUNG LM281BPLUS" 153.91,100 r180 top (schematic designator D6)
D6_CW11 "SPMWH1228MD7WAPMVL" "SAMSUNG LM281BPLUS" 271.594,160 r180 top (schematic designator D6)
D6_CW12 "SPMWH1228MD7WAPMVL" "SAMSUNG LM281BPLUS" 99.068,100 r180 top (schematic designator D6)
D6_CW13 "SPMWH1228MD7WAPMVL" "SAMSUNG LM281BPLUS" 157.91,160 r180 top (schematic designator D6)
D6_CW14 "SPMWH1228MD7WAPMVL" "SAMSUNG LM281BPLUS" 214.752,160 r180 top (schematic designator D6)
D6_CW15 "SPMWH1228MD7WAPMVL" "SAMSUNG LM281BPLUS" 101.068,160 r180 top (schematic designator D6)
D6_CW16 "SPMWH1228MD7WAPMVL" "SAMSUNG LM281BPLUS" 44.226,160 r180 top (schematic designator D6)
D6_CW17 "SPMWH1228MD7WAPMVL" "SAMSUNG LM281BPLUS" 208.752,70 r180 top (schematic designator D6)
D6_CW18 "SPMWH1228MD7WAPMVL" "SAMSUNG LM281BPLUS" 153.91,70 r180 top (schematic designator D6)
D6_CW19 "SPMWH1228MD7WAPMVL" "SAMSUNG LM281BPLUS" 99.068,70 r180 top (schematic designator D6)
D6_CW20 "SPMWH1228MD7WAPMVL" "SAMSUNG LM281BPLUS" 44.226,70 r180 top (schematic designator D6)
D7_CW1 "SPMWH1228MD7WAPMVL" "SAMSUNG LM281BPLUS" 257.384,25 r180 top (schematic designator D7)
D7_CW2 "SPMWH1228MD7WAPMVL" "SAMSUNG LM281BPLUS" 200.542,25 r180 top (schematic designator D7)
D7_CW3 "SPMWH1228MD7WAPMVL" "SAMSUNG LM281BPLUS" 143.7,25 r180 top (schematic designator D7)
D7_CW4 "SPMWH1228MD7WAPMVL" "SAMSUNG LM281BPLUS" 86.858,25 r180 top (schematic designator D7)
D7_CW5 "SPMWH1228MD7WAPMVL" "SAMSUNG LM281BPLUS" 30.016,25 r180 top (schematic designator D7)
D7_CW6 "SPMWH1228MD7WAPMVL" "SAMSUNG LM281BPLUS" 249.384,70 r180 top (schematic designator D7)
D7_CW7 "SPMWH1228MD7WAPMVL" "SAMSUNG LM281BPLUS" 194.542,100 r180 top (schematic designator D7)
D7_CW8 "SPMWH1228MD7WAPMVL" "SAMSUNG LM281BPLUS" 249.384,100 r180 top (schematic designator D7)
D7_CW9 "SPMWH1228MD7WAPMVL" "SAMSUNG LM281BPLUS" 30.016,100 r180 top (schematic designator D7)
D7_CW10 "SPMWH1228MD7WAPMVL" "SAMSUNG LM281BPLUS" 139.7,100 r180 top (schematic designator D7)
D7_CW11 "SPMWH1228MD7WAPMVL" "SAMSUNG LM281BPLUS" 257.384,160 r180 top (schematic designator D7)
D7_CW12 "SPMWH1228MD7WAPMVL" "SAMSUNG LM281BPLUS" 84.858,100 r180 top (schematic designator D7)
D7_CW13 "SPMWH1228MD7WAPMVL" "SAMSUNG LM281BPLUS" 143.7,160 r180 top (schematic designator D7)
D7_CW14 "SPMWH1228MD7WAPMVL" "SAMSUNG LM281BPLUS" 200.542,160 r180 top (schematic designator D7)
D7_CW15 "SPMWH1228MD7WAPMVL" "SAMSUNG LM281BPLUS" 86.858,160 r180 top (schematic designator D7)
D7_CW16 "SPMWH1228MD7WAPMVL" "SAMSUNG LM281BPLUS" 30.016,160 r180 top (schematic designator D7)
D7_CW17 "SPMWH1228MD7WAPMVL" "SAMSUNG LM281BPLUS" 194.542,70 r180 top (schematic designator D7)
D7_CW18 "SPMWH1228MD7WAPMVL" "SAMSUNG LM281BPLUS" 139.7,70 r180 top (schematic designator D7)
D7_CW19 "SPMWH1228MD7WAPMVL" "SAMSUNG LM281BPLUS" 84.858,70 r180 top (schematic designator D7)
D7_CW20 "SPMWH1228MD7WAPMVL" "SAMSUNG LM281BPLUS" 30.016,70 r180 top (schematic designator D7)
D8_CW1 "SPMWH1228MD7WAPMVL" "SAMSUNG LM281BPLUS" 243.173,25 r180 top (schematic designator D8)
D8_CW2 "SPMWH1228MD7WAPMVL" "SAMSUNG LM281BPLUS" 186.331,25 r180 top (schematic designator D8)
D8_CW3 "SPMWH1228MD7WAPMVL" "SAMSUNG LM281BPLUS" 129.489,25 r180 top (schematic designator D8)
D8_CW4 "SPMWH1228MD7WAPMVL" "SAMSUNG LM281BPLUS" 72.647,25 r180 top (schematic designator D8)
D8_CW5 "SPMWH1228MD7WAPMVL" "SAMSUNG LM281BPLUS" 15.805,25 r180 top (schematic designator D8)
D8_CW6 "SPMWH1228MD7WAPMVL" "SAMSUNG LM281BPLUS" 235.173,70 r180 top (schematic designator D8)
D8_CW7 "SPMWH1228MD7WAPMVL" "SAMSUNG LM281BPLUS" 180.331,100 r180 top (schematic designator D8)
D8_CW8 "SPMWH1228MD7WAPMVL" "SAMSUNG LM281BPLUS" 235.173,100 r180 top (schematic designator D8)
D8_CW9 "SPMWH1228MD7WAPMVL" "SAMSUNG LM281BPLUS" 15.805,100 r180 top (schematic designator D8)
D8_CW10 "SPMWH1228MD7WAPMVL" "SAMSUNG LM281BPLUS" 125.489,100 r180 top (schematic designator D8)
D8_CW11 "SPMWH1228MD7WAPMVL" "SAMSUNG LM281BPLUS" 243.173,160 r180 top (schematic designator D8)
D8_CW12 "SPMWH1228MD7WAPMVL" "SAMSUNG LM281BPLUS" 70.647,100 r180 top (schematic designator D8)
D8_CW13 "SPMWH1228MD7WAPMVL" "SAMSUNG LM281BPLUS" 129.489,160 r180 top (schematic designator D8)
D8_CW14 "SPMWH1228MD7WAPMVL" "SAMSUNG LM281BPLUS" 186.331,160 r180 top (schematic designator D8)
D8_CW15 "SPMWH1228MD7WAPMVL" "SAMSUNG LM281BPLUS" 72.647,160 r180 top (schematic designator D8)
D8_CW16 "SPMWH1228MD7WAPMVL" "SAMSUNG LM281BPLUS" 15.805,160 r180 top (schematic designator D8)
D8_CW17 "SPMWH1228MD7WAPMVL" "SAMSUNG LM281BPLUS" 180.331,70 r180 top (schematic designator D8)
D8_CW18 "SPMWH1228MD7WAPMVL" "SAMSUNG LM281BPLUS" 125.489,70 r180 top (schematic designator D8)
D8_CW19 "SPMWH1228MD7WAPMVL" "SAMSUNG LM281BPLUS" 70.647,70 r180 top (schematic designator D8)
D8_CW20 "SPMWH1228MD7WAPMVL" "SAMSUNG LM281BPLUS" 15.805,70 r180 top (schematic designator D8)
D9_NW1 "SPMWH1228MD7WATMVL" "SAMSUNG LM281BPLUS" 285.805,10 r180 top (schematic designator D9)
D9_NW2 "SPMWH1228MD7WATMVL" "SAMSUNG LM281BPLUS" 245.805,10 r180 top (schematic designator D9)
D9_NW3 "SPMWH1228MD7WATMVL" "SAMSUNG LM281BPLUS" 205.805,10 r180 top (schematic designator D9)
D9_NW4 "SPMWH1228MD7WATMVL" "SAMSUNG LM281BPLUS" 165.805,10 r180 top (schematic designator D9)
D9_NW5 "SPMWH1228MD7WATMVL" "SAMSUNG LM281BPLUS" 125.805,10 r180 top (schematic designator D9)
D9_NW6 "SPMWH1228MD7WATMVL" "SAMSUNG LM281BPLUS" 85.805,10 r180 top (schematic designator D9)
D9_NW7 "SPMWH1228MD7WATMVL" "SAMSUNG LM281BPLUS" 45.805,10 r180 top (schematic designator D9)
D9_NW8 "SPMWH1228MD7WATMVL" "SAMSUNG LM281BPLUS" 205.805,175 r180 top (schematic designator D9)
D9_NW9 "SPMWH1228MD7WATMVL" "SAMSUNG LM281BPLUS" 125.805,175 r180 top (schematic designator D9)
D9_NW10 "SPMWH1228MD7WATMVL" "SAMSUNG LM281BPLUS" 245.805,55 r180 top (schematic designator D9)
D9_NW11 "SPMWH1228MD7WATMVL" "SAMSUNG LM281BPLUS" 285.805,175 r180 top (schematic designator D9)
D9_NW12 "SPMWH1228MD7WATMVL" "SAMSUNG LM281BPLUS" 85.805,55 r180 top (schematic designator D9)
D9_NW13 "SPMWH1228MD7WATMVL" "SAMSUNG LM281BPLUS" 45.805,55 r180 top (schematic designator D9)
D9_NW14 "SPMWH1228MD7WATMVL" "SAMSUNG LM281BPLUS" 45.805,175 r180 top (schematic designator D9)
D9_NW15 "SPMWH1228MD7WATMVL" "SAMSUNG LM281BPLUS" 45.805,130 r180 top (schematic designator D9)
D9_NW16 "SPMWH1228MD7WATMVL" "SAMSUNG LM281BPLUS" 85.805,130 r180 top (schematic designator D9)
D9_NW17 "SPMWH1228MD7WATMVL" "SAMSUNG LM281BPLUS" 125.805,130 r180 top (schematic designator D9)
D9_NW18 "SPMWH1228MD7WATMVL" "SAMSUNG LM281BPLUS" 165.805,130 r180 top (schematic designator D9)
D9_NW19 "SPMWH1228MD7WATMVL" "SAMSUNG LM281BPLUS" 205.805,130 r180 top (schematic designator D9)
D9_NW20 "SPMWH1228MD7WATMVL" "SAMSUNG LM281BPLUS" 245.805,130 r180 top (schematic designator D9)
D9_NW21 "SPMWH1228MD7WATMVL" "SAMSUNG LM281BPLUS" 285.805,130 r180 top (schematic designator D9)
D9_NW22 "SPMWH1228MD7WATMVL" "SAMSUNG LM281BPLUS" 165.805,175 r180 top (schematic designator D9)
D9_NW23 "SPMWH1228MD7WATMVL" "SAMSUNG LM281BPLUS" 125.805,55 r180 top (schematic designator D9)
D9_NW24 "SPMWH1228MD7WATMVL" "SAMSUNG LM281BPLUS" 245.805,175 r180 top (schematic designator D9)
D9_NW25 "SPMWH1228MD7WATMVL" "SAMSUNG LM281BPLUS" 165.805,55 r180 top (schematic designator D9)
D9_NW26 "SPMWH1228MD7WATMVL" "SAMSUNG LM281BPLUS" 285.805,55 r180 top (schematic designator D9)
D9_NW27 "SPMWH1228MD7WATMVL" "SAMSUNG LM281BPLUS" 205.805,55 r180 top (schematic designator D9)
D9_NW28 "SPMWH1228MD7WATMVL" "SAMSUNG LM281BPLUS" 85.805,175 r180 top (schematic designator D9)
D10_NW1 "SPMWH1228MD7WATMVL" "SAMSUNG LM281BPLUS" 275.805,10 r180 top (schematic designator D10)
D10_NW2 "SPMWH1228MD7WATMVL" "SAMSUNG LM281BPLUS" 235.805,10 r180 top (schematic designator D10)
D10_NW3 "SPMWH1228MD7WATMVL" "SAMSUNG LM281BPLUS" 195.805,10 r180 top (schematic designator D10)
D10_NW4 "SPMWH1228MD7WATMVL" "SAMSUNG LM281BPLUS" 155.805,10 r180 top (schematic designator D10)
D10_NW5 "SPMWH1228MD7WATMVL" "SAMSUNG LM281BPLUS" 115.805,10 r180 top (schematic designator D10)
D10_NW6 "SPMWH1228MD7WATMVL" "SAMSUNG LM281BPLUS" 75.805,10 r180 top (schematic designator D10)
D10_NW7 "SPMWH1228MD7WATMVL" "SAMSUNG LM281BPLUS" 35.805,10 r180 top (schematic designator D10)
D10_NW8 "SPMWH1228MD7WATMVL" "SAMSUNG LM281BPLUS" 195.805,175 r180 top (schematic designator D10)
D10_NW9 "SPMWH1228MD7WATMVL" "SAMSUNG LM281BPLUS" 115.805,175 r180 top (schematic designator D10)
D10_NW10 "SPMWH1228MD7WATMVL" "SAMSUNG LM281BPLUS" 235.805,55 r180 top (schematic designator D10)
D10_NW11 "SPMWH1228MD7WATMVL" "SAMSUNG LM281BPLUS" 275.805,175 r180 top (schematic designator D10)
D10_NW12 "SPMWH1228MD7WATMVL" "SAMSUNG LM281BPLUS" 75.805,55 r180 top (schematic designator D10)
D10_NW13 "SPMWH1228MD7WATMVL" "SAMSUNG LM281BPLUS" 35.805,55 r180 top (schematic designator D10)
D10_NW14 "SPMWH1228MD7WATMVL" "SAMSUNG LM281BPLUS" 35.805,175 r180 top (schematic designator D10)
D10_NW15 "SPMWH1228MD7WATMVL" "SAMSUNG LM281BPLUS" 35.805,130 r180 top (schematic designator D10)
D10_NW16 "SPMWH1228MD7WATMVL" "SAMSUNG LM281BPLUS" 75.805,130 r180 top (schematic designator D10)
D10_NW17 "SPMWH1228MD7WATMVL" "SAMSUNG LM281BPLUS" 115.805,130 r180 top (schematic designator D10)
D10_NW18 "SPMWH1228MD7WATMVL" "SAMSUNG LM281BPLUS" 155.805,130 r180 top (schematic designator D10)
D10_NW19 "SPMWH1228MD7WATMVL" "SAMSUNG LM281BPLUS" 195.805,130 r180 top (schematic designator D10)
D10_NW20 "SPMWH1228MD7WATMVL" "SAMSUNG LM281BPLUS" 235.805,130 r180 top (schematic designator D10)
D10_NW21 "SPMWH1228MD7WATMVL" "SAMSUNG LM281BPLUS" 275.805,130 r180 top (schematic designator D10)
D10_NW22 "SPMWH1228MD7WATMVL" "SAMSUNG LM281BPLUS" 155.805,175 r180 top (schematic designator D10)
D10_NW23 "SPMWH1228MD7WATMVL" "SAMSUNG LM281BPLUS" 115.805,55 r180 top (schematic designator D10)
D10_NW24 "SPMWH1228MD7WATMVL" "SAMSUNG LM281BPLUS" 235.805,175 r180 top (schematic designator D10)
D10_NW25 "SPMWH1228MD7WATMVL" "SAMSUNG LM281BPLUS" 155.805,55 r180 top (schematic designator D10)
D10_NW26 "SPMWH1228MD7WATMVL" "SAMSUNG LM281BPLUS" 275.805,55 r180 top (schematic designator D10)
D10_NW27 "SPMWH1228MD7WATMVL" "SAMSUNG LM281BPLUS" 195.805,55 r180 top (schematic designator D10)
D10_NW28 "SPMWH1228MD7WATMVL" "SAMSUNG LM281BPLUS" 75.805,175 r180 top (schematic designator D10)
D11_NW1 "SPMWH1228MD7WATMVL" "SAMSUNG LM281BPLUS" 265.805,10 r180 top (schematic designator D11)
D11_NW2 "SPMWH1228MD7WATMVL" "SAMSUNG LM281BPLUS" 225.805,10 r180 top (schematic designator D11)
D11_NW3 "SPMWH1228MD7WATMVL" "SAMSUNG LM281BPLUS" 185.805,10 r180 top (schematic designator D11)
D11_NW4 "SPMWH1228MD7WATMVL" "SAMSUNG LM281BPLUS" 145.805,10 r180 top (schematic designator D11)
D11_NW5 "SPMWH1228MD7WATMVL" "SAMSUNG LM281BPLUS" 105.805,10 r180 top (schematic designator D11)
D11_NW6 "SPMWH1228MD7WATMVL" "SAMSUNG LM281BPLUS" 65.805,10 r180 top (schematic designator D11)
D11_NW7 "SPMWH1228MD7WATMVL" "SAMSUNG LM281BPLUS" 25.805,10 r180 top (schematic designator D11)
D11_NW8 "SPMWH1228MD7WATMVL" "SAMSUNG LM281BPLUS" 185.805,175 r180 top (schematic designator D11)
D11_NW9 "SPMWH1228MD7WATMVL" "SAMSUNG LM281BPLUS" 105.805,175 r180 top (schematic designator D11)
D11_NW10 "SPMWH1228MD7WATMVL" "SAMSUNG LM281BPLUS" 225.805,55 r180 top (schematic designator D11)
D11_NW11 "SPMWH1228MD7WATMVL" "SAMSUNG LM281BPLUS" 265.805,175 r180 top (schematic designator D11)
D11_NW12 "SPMWH1228MD7WATMVL" "SAMSUNG LM281BPLUS" 65.805,55 r180 top (schematic designator D11)
D11_NW13 "SPMWH1228MD7WATMVL" "SAMSUNG LM281BPLUS" 25.805,55 r180 top (schematic designator D11)
D11_NW14 "SPMWH1228MD7WATMVL" "SAMSUNG LM281BPLUS" 25.805,175 r180 top (schematic designator D11)
D11_NW15 "SPMWH1228MD7WATMVL" "SAMSUNG LM281BPLUS" 25.805,130 r180 top (schematic designator D11)
D11_NW16 "SPMWH1228MD7WATMVL" "SAMSUNG LM281BPLUS" 65.805,130 r180 top (schematic designator D11)
D11_NW17 "SPMWH1228MD7WATMVL" "SAMSUNG LM281BPLUS" 105.805,130 r180 top (schematic designator D11)
D11_NW18 "SPMWH1228MD7WATMVL" "SAMSUNG LM281BPLUS" 145.805,130 r180 top (schematic designator D11)
D11_NW19 "SPMWH1228MD7WATMVL" "SAMSUNG LM281BPLUS" 185.805,130 r180 top (schematic designator D11)
D11_NW20 "SPMWH1228MD7WATMVL" "SAMSUNG LM281BPLUS" 225.805,130 r180 top (schematic designator D11)
D11_NW21 "SPMWH1228MD7WATMVL" "SAMSUNG LM281BPLUS" 265.805,130 r180 top (schematic designator D11)
D11_NW22 "SPMWH1228MD7WATMVL" "SAMSUNG LM281BPLUS" 145.805,175 r180 top (schematic designator D11)
D11_NW23 "SPMWH1228MD7WATMVL" "SAMSUNG LM281BPLUS" 105.805,55 r180 top (schematic designator D11)
D11_NW24 "SPMWH1228MD7WATMVL" "SAMSUNG LM281BPLUS" 225.805,175 r180 top (schematic designator D11)
D11_NW25 "SPMWH1228MD7WATMVL" "SAMSUNG LM281BPLUS" 145.805,55 r180 top (schematic designator D11)
D11_NW26 "SPMWH1228MD7WATMVL" "SAMSUNG LM281BPLUS" 265.805,55 r180 top (schematic designator D11)
D11_NW27 "SPMWH1228MD7WATMVL" "SAMSUNG LM281BPLUS" 185.805,55 r180 top (schematic designator D11)
D11_NW28 "SPMWH1228MD7WATMVL" "SAMSUNG LM281BPLUS" 65.805,175 r180 top (schematic designator D11)
D12_NW1 "SPMWH1228MD7WATMVL" "SAMSUNG LM281BPLUS" 255.805,10 r180 top (schematic designator D12)
D12_NW2 "SPMWH1228MD7WATMVL" "SAMSUNG LM281BPLUS" 215.805,10 r180 top (schematic designator D12)
D12_NW3 "SPMWH1228MD7WATMVL" "SAMSUNG LM281BPLUS" 175.805,10 r180 top (schematic designator D12)
D12_NW4 "SPMWH1228MD7WATMVL" "SAMSUNG LM281BPLUS" 135.805,10 r180 top (schematic designator D12)
D12_NW5 "SPMWH1228MD7WATMVL" "SAMSUNG LM281BPLUS" 95.805,10 r180 top (schematic designator D12)
D12_NW6 "SPMWH1228MD7WATMVL" "SAMSUNG LM281BPLUS" 55.805,10 r180 top (schematic designator D12)
D12_NW7 "SPMWH1228MD7WATMVL" "SAMSUNG LM281BPLUS" 15.805,10 r180 top (schematic designator D12)
D12_NW8 "SPMWH1228MD7WATMVL" "SAMSUNG LM281BPLUS" 175.805,175 r180 top (schematic designator D12)
D12_NW9 "SPMWH1228MD7WATMVL" "SAMSUNG LM281BPLUS" 95.805,175 r180 top (schematic designator D12)
D12_NW10 "SPMWH1228MD7WATMVL" "SAMSUNG LM281BPLUS" 215.805,55 r180 top (schematic designator D12)
D12_NW11 "SPMWH1228MD7WATMVL" "SAMSUNG LM281BPLUS" 255.805,175 r180 top (schematic designator D12)
D12_NW12 "SPMWH1228MD7WATMVL" "SAMSUNG LM281BPLUS" 55.805,55 r180 top (schematic designator D12)
D12_NW13 "SPMWH1228MD7WATMVL" "SAMSUNG LM281BPLUS" 15.805,55 r180 top (schematic designator D12)
D12_NW14 "SPMWH1228MD7WATMVL" "SAMSUNG LM281BPLUS" 15.805,175 r180 top (schematic designator D12)
D12_NW15 "SPMWH1228MD7WATMVL" "SAMSUNG LM281BPLUS" 15.805,130 r180 top (schematic designator D12)
D12_NW16 "SPMWH1228MD7WATMVL" "SAMSUNG LM281BPLUS" 55.805,130 r180 top (schematic designator D12)
D12_NW17 "SPMWH1228MD7WATMVL" "SAMSUNG LM281BPLUS" 95.805,130 r180 top (schematic designator D12)
D12_NW18 "SPMWH1228MD7WATMVL" "SAMSUNG LM281BPLUS" 135.805,130 r180 top (schematic designator D12)
D12_NW19 "SPMWH1228MD7WATMVL" "SAMSUNG LM281BPLUS" 175.805,130 r180 top (schematic designator D12)
D12_NW20 "SPMWH1228MD7WATMVL" "SAMSUNG LM281BPLUS" 215.805,130 r180 top (schematic designator D12)
D12_NW21 "SPMWH1228MD7WATMVL" "SAMSUNG LM281BPLUS" 255.805,130 r180 top (schematic designator D12)
D12_NW22 "SPMWH1228MD7WATMVL" "SAMSUNG LM281BPLUS" 135.805,175 r180 top (schematic designator D12)
D12_NW23 "SPMWH1228MD7WATMVL" "SAMSUNG LM281BPLUS" 95.805,55 r180 top (schematic designator D12)
D12_NW24 "SPMWH1228MD7WATMVL" "SAMSUNG LM281BPLUS" 215.805,175 r180 top (schematic designator D12)
D12_NW25 "SPMWH1228MD7WATMVL" "SAMSUNG LM281BPLUS" 135.805,55 r180 top (schematic designator D12)
D12_NW26 "SPMWH1228MD7WATMVL" "SAMSUNG LM281BPLUS" 255.805,55 r180 top (schematic designator D12)
D12_NW27 "SPMWH1228MD7WATMVL" "SAMSUNG LM281BPLUS" 175.805,55 r180 top (schematic designator D12)
D12_NW28 "SPMWH1228MD7WATMVL" "SAMSUNG LM281BPLUS" 55.805,175 r180 top (schematic designator D12)
J1 "0436500412" "MOLEX 436500412" 289,67 r90 top
J2 "0436500412" "MOLEX 436500412" 289,88 r90 top
J3 "0436500412" "MOLEX 436500412" 289,109 r90 top
R1 "47k" "NTC 0402_1005" 255.45,61 r180 top
R2 "47k" "NTC 0402_1005" 255.45,90 r180 top
R3 "47k" "NTC 0402_1005" 255.45,106 r180 top

## Footprints (in the part's own frame and the unit in brackets; to place one, negate y for a bottom-side part, rotate by r counter-clockwise, add the part's x,y. Pads: shape width x height; smd on the part's side, far side on the other; paste and mask are expansions set on the pad)
"MOLEX 436500412" [mm]
  rect 1.27x2.92 smd: 1(4.5,5) 2(1.5,5) 3(-1.5,5) 4(-4.5,5)
  rect 3.43x1.65 smd: M(-8.385,-0.47) M(8.385,-0.47)
  silkscreen extent -8.5,-5 8.5,5, body extent -9.82,-4.95 9.82,5.79, height 5.68
"NTC 0402_1005" [mm] "Chip Thermistor, 2-Leads, Body 1.00x0.50mm, IPC Medium Density"
  rect 0.5x0.55 smd: 1(-0.45,0) 2(0.45,0)
  silkscreen extent -0.9,-0.4 0.9,0.4, body extent -0.5,-0.26 0.5,0.26, height 0.52
"SAMSUNG LM281BPLUS" [mm]
  rect 1.11x2.2 smd: A(-1.34,0)
  rect 2.18x2.2 smd: C(0.805,0)
  silkscreen extent -1.4,-1.7 1.4,1.7, body extent -1.75,-1.4 1.75,1.4, height 0.7